# Altium PCB 蓝牙门禁PCB.PcbDoc
Units mm, origin at the board's own origin, x right, y up, seen from the top; angles counter-clockwise.
Board outline 99.95 x 68.33 mm, 2 copper layers (Top Layer, Bottom Layer); 17 components, 26 nets, 120 pads, 27 vias.
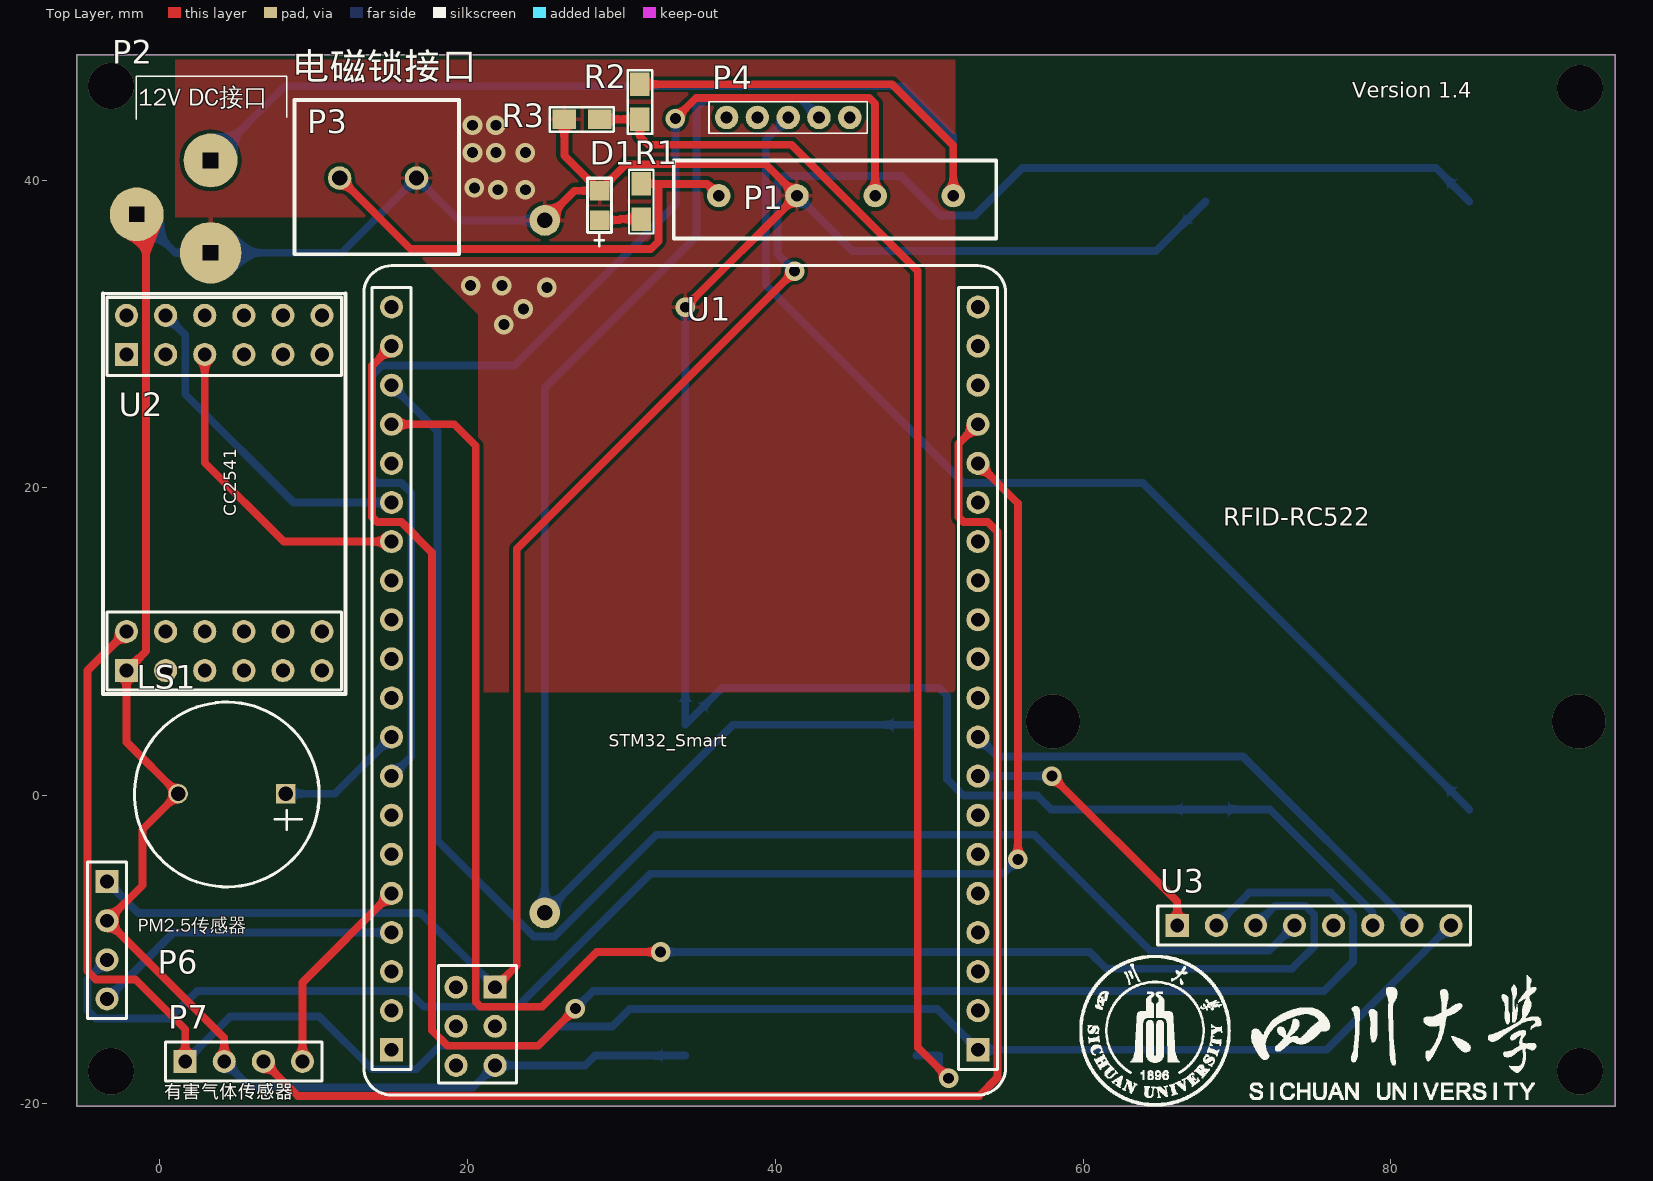
[diagram p0: Top Layer view]
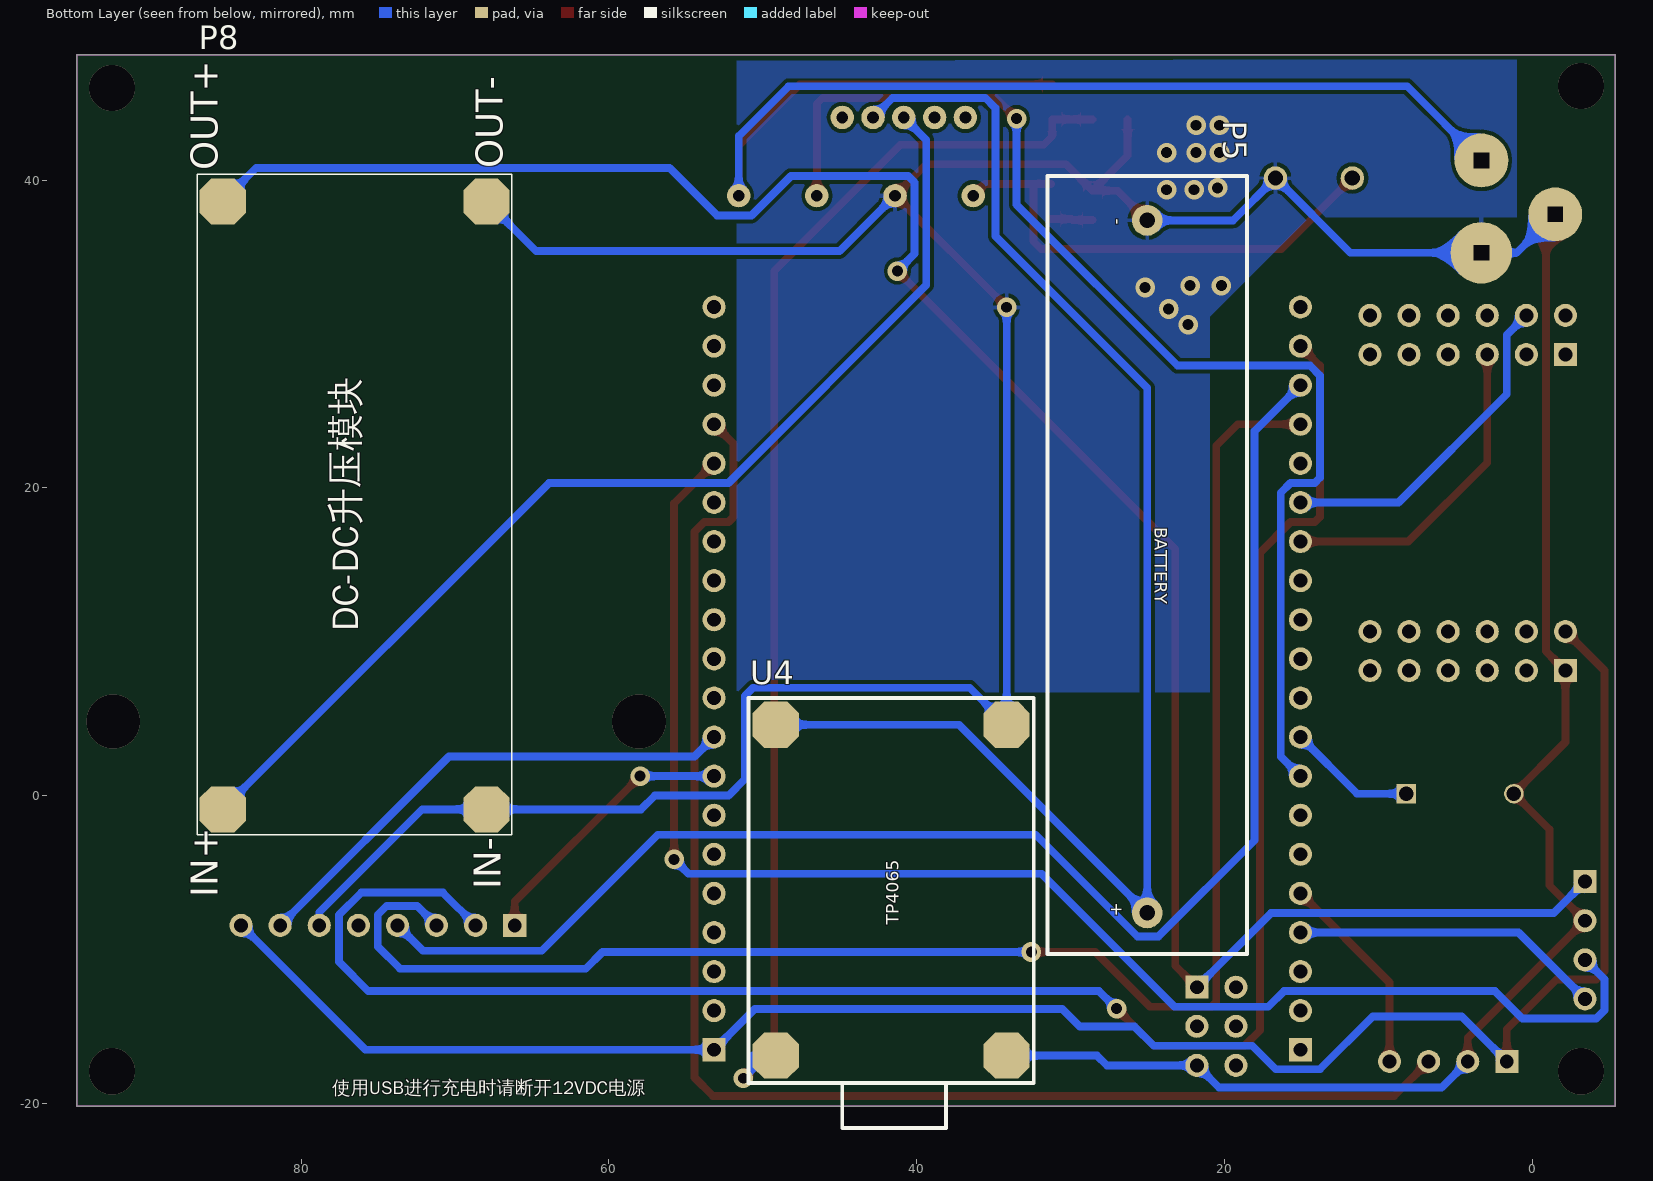
[diagram p1: Bottom Layer view, seen from below]

## Layer stack, top to bottom
Top Solder: solder mask 0.0102, Solder Resist, Dk 3.5
Top Layer: signal copper 0.0356
Dielectric 1: dielectric 0.32, FR-4, Dk 4.8
Bottom Layer: signal copper 0.0356
Bottom Solder: solder mask 0.0102, Solder Resist, Dk 3.5

## Board outline
-5.386,48.133 94.563,48.133 94.563,-20.193 -5.386,-20.193

## Design rules (kind name [scope] priority, off if disabled: settings)
Clearance [All] p1: gap=0.254
PolygonConnect [All] p1: connectstyle=Relief reliefconductorwidth=0.254 reliefentries=4 polygonreliefangle="90 Angle" airgapwidth=0.254
RoutingVias [All] p1: holewidth=0.711 width=1.27 viastyle="Through Hole" minholewidth=0.711 minwidth=1.27 maxholewidth=0.711 maxwidth=1.27
SolderMaskExpansion [All] p1: expansion=0.102
Width [All] p1: maxlimit=1.27 minlimit=0.254 preferedwidth=0.508 minimp=50.000000 maximp=50.000000 favimp=50.000000
30 further rules are at their usual default settings.

## Components (designator, comment, footprint, x,y, rotation, side; value= is the part's Value field where it differs from the comment)
D1 "LED0" 0805-led 28.575,38.354 r90 top
LS1 "Bell" BUZZER-12MM 4.445,0.127 r180 top
P1 "干簧继电器" 干簧继电器SIP-1A05 51.562,38.989 r180 top
P2 "12V电源" DC-005(5.5MM) 3.302,41.275 r270 top
P3 "接电磁锁" 接线端子-0.5 11.684,40.132 r0 top
P4 "电源开关" 拨动开关（2mm） 44.831,44.069 r180 top
P5 "电池座" 7号电池盒-4.5CM 25.019,-6.731 r90 bottom
P6 "MQ-2接口" HDR1X4 -3.429,-5.588 r270 top
P7 "雾霾传感器接口" HDR1X4 1.651,-17.272 r0 top
P8 "升压模块" DC-DC升压模块 85.09,-0.889 r90 bottom
R1 "500" 0805-SMALL 31.271,39.752 r270 top
R2 "100欧" 0805-SMALL 31.19,46.228 r270 top
R3 "100欧" 0805-SMALL 28.575,43.942 r180 top
U1 "STM32" STM32_Smart 15.061,-16.51 r270 top
U2 "CC2541" Smart_RF_2541 -2.159,8.128 r90 top
U3 "RC522" HDR1X8 66.114,-8.428 r0 top
U4 "TP4065" TP4065_模块 49.149,-16.891 r90 bottom

## Footprints (in the part's own frame and the unit in brackets; to place one, negate y for a bottom-side part, rotate by r counter-clockwise, add the part's x,y. Pads: shape width x height; smd on the part's side, far side on the other; paste and mask are expansions set on the pad)
7号电池盒-4.5CM [mm]
  round 2 hole 1: 1(-0.889,0) 2(44.111,0)
  silkscreen extent -3.56,-6.48 46.99,6.48
0805-led [mil]
  rect 50x50 smd: 1(-37.5,0) 2(37.5,0)
  silkscreen extent -105,-31 69,31
0805-SMALL [mil]
  rect 60x50 smd: 1(0,0) 2(90,0)
  silkscreen extent -36,-31 127,32
BUZZER-12MM [mm]
  rect 1.27x1.27 hole 0.95: 1(-3.75,0)
  round 1.27 hole 0.95: 2(3.25,0)
  silkscreen extent -5.91,-5.95 6.09,6.05
DC-005(5.5MM) [mm]
  round 3.5 hole 1 square: 1(0,0) 2(3.5,-4.8)
  round 4 hole 1 square: 3(6,0)
  silkscreen extent -5.46,-4.83 -2.67,4.95
DC-DC升压模块 [mil]
  oct 118.11x118.11 / inner oct 118.11x118.11 / far side oct 0x0 all layers, no hole: 1(0,0) 2(0,-675) 3(1555,0) 4(1555,-675)
  silkscreen extent -65,-740 1625,65
HDR1X4 [mm] "Connector; Header; 4 Position"
  rect 1.5x1.5 hole 0.9: 1(0,0)
  round 1.5 hole 0.9: 2(2.54,0) 3(5.08,0) 4(7.62,0)
  silkscreen extent -1.27,-1.27 8.89,1.27
HDR1X8 [mm] "Connector; Header; 8 Position"
  rect 1.5x1.5 hole 0.9: 1(0,0)
  round 1.5 hole 0.9: 2(2.54,0) 3(5.08,0) 4(7.62,0) 5(10.16,0) 6(12.7,0) 7(15.24,0) 8(17.78,0)
  silkscreen extent -1.27,-1.27 19.05,1.27
Smart_RF_2541 [mm]
  rect 1.5x1.5 hole 0.9: 1(0,0) 13(20.54,0)
  round 1.5 hole 0.9: 2(0,-2.54) 3(0,-5.08) 4(0,-7.62) 5(0,-10.16) 6(0,-12.7) 7(2.54,-12.7) 8(2.54,-10.16) 9(2.54,-7.62) 10(2.54,-5.08) 11(2.54,-2.54) 12(2.54,0) 14(20.54,-2.54) 15(20.54,-5.08) 16(20.54,-7.62) 17(20.54,-10.16) 18(20.54,-12.7) 19(23.08,-12.7) 20(23.08,-10.16) 21(23.08,-7.62) 22(23.08,-5.08) 23(23.08,-2.54) 24(23.08,0)
  silkscreen extent -1.52,-14.22 24.51,1.52
STM32_Smart [mm]
  rect 1.5x1.5 hole 0.9: 1(0,38.1) 40(0,0) 46(-4.064,6.731)
  round 1.5 hole 0.9: 2(-2.54,38.1) 3(-5.08,38.1) 4(-7.62,38.1) 5(-10.16,38.1) 6(-12.7,38.1) 7(-15.24,38.1) 8(-17.78,38.1) 9(-20.32,38.1) 10(-22.86,38.1) 11(-25.4,38.1) 12(-27.94,38.1) 13(-30.48,38.1) 14(-33.02,38.1) 15(-35.56,38.1) 16(-38.1,38.1) 17(-40.64,38.1) 18(-43.18,38.1) 19(-45.72,38.1) 20(-48.26,38.1) 21(-48.26,0) 22(-45.72,0) 23(-43.18,0) 24(-40.64,0) 25(-38.1,0) 26(-35.56,0) 27(-33.02,0) 28(-30.48,0) 29(-27.94,0) 30(-25.4,0) 31(-22.86,0) 32(-20.32,0) 33(-17.78,0) 34(-15.24,0) 35(-12.7,0) 36(-10.16,0) 37(-7.62,0) 38(-5.08,0) 39(-2.54,0) 41(-4.064,4.191) 42(-1.524,4.191) 43(1.016,4.191) 44(1.016,6.731) 45(-1.524,6.731)
  silkscreen extent -50.95,-1.8 2.94,39.9
TP4065_模块 [mm]
  oct 3x3 / inner oct 3x3 / far side oct 0x0 all layers, no hole: 1(0,0) 2(0,-15) 3(21.5,-15) 4(21.5,0)
  silkscreen extent -4.7,-16.76 23.24,1.78
干簧继电器SIP-1A05 [mil]
  round 60 hole 30: 1(0,0) 2(200,0) 3(400,0) 4(600,0)
  silkscreen extent -110,-90 715,110
拨动开关（2mm） [mil]
  round 60 hole 30: 0(0,0) 0(314.96,0) 1(78.74,0) 2(157.48,0) 3(236.22,0)
  silkscreen extent -45,-40 360,40
接线端子-0.5 [mil]
  round 60 hole 39.37: 1(0,0) 2(196.85,0)
  silkscreen extent -115,-195 305,200

## Part data
D1: "Typical INFRARED GaAs LED"
LS1: "Electrical Bell"
P1 P6 P7 P8: library part "Header 4", "Header, 4-Pin"
P2 P4: library part "Header 3", "Header, 3-Pin"
P3: library part "Header 2H", "Header, 2-Pin, Right Angle"
P5: library part "Header 2", "Header, 2-Pin"
R1 R2 R3: library part RES2
U1: library part STM32_Smart
U2: library part Smart_RF_2541
U3: library part RFID_RC522
U4: library part "TP4056_ 模块"

## Via types
v1: diameter 1.27, hole 0.711, Top Layer to Bottom Layer, 21 vias
v2: diameter 3, hole 3, Top Layer to Bottom Layer, 4 vias
v3: diameter 3.5, hole 3.5, Top Layer to Bottom Layer, 2 vias

## Nets (pads, with @x,y where several pads share a name; then routed paths per layer and width w, separated by ;. In a path a pad name is that pad's centre, name@x,y a point inside that pad or via, vN(x,y) a via of type N, cw(c..) or ccw(c..) an arc to the next point about the centre after c; other vN are vias at no path point)
ADC1: P6.3 U1.16 | length 96.4
  Top Layer w0.508: U1.16 55.757,18.994 v1(55.757,-4.139)
  Bottom Layer w0.508: P6.3 -4.695,-11.934 -4.695,-13.944 -4.162,-14.477 0.639,-14.477 2.417,-12.699 16.133,-12.699 17.149,-13.715 23.245,-13.715 31.881,-5.079 54.817,-5.079 v1(55.757,-4.139)
ADC2: P7.3 U1.17 | length 94.1
  Top Layer w0.508: P7.3 8.965,-19.506 53.242,-19.506 54.436,-18.312 54.436,17.146 53.801,17.781 52.226,17.781 51.903,18.104 51.903,22.872 U1.17
GND: D1.2 LS1.2 P1.3 P2.2 P2.3 P3.2 P5.2 P6.2 P7.2 P8.2 P8.4 R3.2 U1.44 U2.1 U3.6 U4.2 U4.3 | length 271.7
  Top Layer w0.508: P2.2 -0.885,37.775 -0.885,9.402 U2.1 -2.159,3.481 LS1.2 -1.114,-2.182 -1.114,-5.813 P6.2 4.191,-15.748 P7.2 ; P5.2 26.946,39.306 D1.2 ; R3.2 26.289,41.592 D1.2 ; v1(34.149,31.736) P1.3 39.369,41.022 30.291,41.022 D1.2
  Bottom Layer w0.508: P2.2 1.002,35.275 P2.3 11.827,35.275 P3.2 19.436,37.38 P5.2 ; P7.2 5.892,-18.973 20.345,-18.973 U1.44 27.639,-17.526 28.274,-16.891 U4.2 ; v1(34.149,31.736) U4.3 36.551,7.011 50.626,7.011 51.159,6.478 51.159,1.068 52.226,0.001 57.016,0.001 57.906,-0.889 P8.2 72.119,-0.889 78.814,-7.584 U3.6 ; P1.3 45.008,35.383 64.72,35.383 P8.4
  other v1: 22.352,30.607 23.622,31.623 25.146,33.02 20.193,33.147 22.225,33.147 21.971,39.37 23.749,39.37 20.447,39.497 20.32,41.783 21.844,41.783 23.749,41.783 20.32,43.561 21.844,43.561
IRQ: U3.5
MISO: U1.23 U3.4 | length 95.6
  Bottom Layer w0.508: U1.23 18.038,23.693 18.038,-2.895 24.286,-9.143 25.658,-9.143 32.262,-2.539 56.823,-2.539 64.367,-10.083 72.079,-10.083 U3.4
MOSI: U1.24 U3.3 | length 106
  Top Layer w0.508: U1.24 19.131,24.13 20.527,22.734 20.527,-13.399 20.843,-13.715 24.839,-13.715 28.395,-10.159 v1(32.541,-10.159)
  Bottom Layer w0.508: v1(32.541,-10.159) 60.405,-10.159 61.497,-11.251 73.562,-11.251 75.01,-9.803 75.01,-7.746 74.426,-7.162 72.46,-7.162 U3.3
NetD1_1: D1.1 R1.2 | length 2.7
  Top Layer w0.508: D1.1 29.874,37.401 29.938,37.466 R1.2
NetP1_4: P1.4 P3.1 R1.1 | length 32.1
  Top Layer w0.508: P3.1 16.306,35.51 31.906,35.51 32.414,36.018 32.414,39.498 32.16,39.752 ; R1.1 32.16,39.752 ; P1.4 35.559,39.752 32.16,39.752
NetR2_2: R2.2 R3.1 U4.1 | length 81.9
  Top Layer w0.508: R3.1 R2.2 31.19,42.846 31.744,42.292 41.05,42.292 49.254,34.088 49.254,-16.357 v1(51.261,-18.363)
  Bottom Layer w0.508: U4.1 50.651,-16.891 50.651,-17.754 v1(51.261,-18.363)
P21: U2.11
P22: U2.2
PB4: LS1.1 U1.32 | length 8.4
  Bottom Layer w0.508: LS1.1 11.378,0.127 U1.32
PB5: P1.2 U1.33 | length 78.1
  Top Layer w0.508: v1(33.506,43.994) 34.852,45.34 46.105,45.34 46.482,44.963 P1.2
  Bottom Layer w0.508: U1.33 16.336,2.545 16.336,19.686 15.701,20.321 14.126,20.321 13.796,20.651 13.796,27.306 14.431,27.941 23.041,27.941 33.506,38.406 v1(33.506,43.994)
PB8: P7.4 U1.36 | length 13.3
  Top Layer w0.508: P7.4 9.271,-12.14 U1.36
PB9: P6.4 U1.37 | length 20.3
  Bottom Layer w0.508: P6.4 0.889,-8.89 U1.37
RESET: U2.13
RST: U1.9 U3.7 | length 33.3
  Bottom Layer w0.508: U1.9 54.43,2.541 70.385,2.541 U3.7
SCK: U1.22 U3.2 | length 123.4
  Top Layer w0.508: U1.22 13.796,27.945 13.796,18.111 14.126,17.781 15.701,17.781 17.682,15.8 17.682,-15.239 18.698,-16.255 24.591,-16.255 v1(27.004,-13.842)
  Bottom Layer w0.508: v1(27.004,-13.842) 28.147,-12.699 75.627,-12.699 77.532,-10.794 77.532,-7.746 76.084,-6.298 70.784,-6.298 U3.2
SDA: U1.8 U3.1 | length 17.9
  Top Layer w0.508: v1(57.967,1.27) 66.114,-6.877 U3.1
  Bottom Layer w0.508: U1.8 v1(57.967,1.27)
STM32RX-2541TX: U1.27 U2.15 | length 21.3
  Top Layer w0.508: U2.15 2.921,21.642 8.053,16.51 U1.27
STM32TX-2541RX: U1.26 U2.23 | length 22
  Bottom Layer w0.508: U2.23 1.655,29.934 1.655,26.087 8.691,19.05 U1.26
VCC: P1.1 P2.1 R2.1 | length 80.7
  Top Layer w0.508: R2.1 47.579,46.228 51.562,42.245 P1.1
  Bottom Layer w0.508: P2.1 8.128,46.101 48.315,46.101 51.562,42.854 P1.1
VCC3.3: P7.1 U1.1 U2.12 U3.8 | length 124.1
  Top Layer w0.508: U2.12 -4.695,8.132 -4.695,-11.404 -4.162,-11.937 -1.597,-11.937 1.651,-15.185 P7.1
  Bottom Layer w0.508: P7.1 4.573,-14.35 10.367,-14.35 13.796,-17.779 16.666,-17.779 18.19,-16.255 24.591,-16.255 25.848,-14.997 29.403,-14.997 30.533,-13.867 50.518,-13.867 U1.1 75.812,-16.51 U3.8
VCC5: P6.1 P8.3 U1.46 | length 137.3
  Top Layer w0.508: U1.46 23.194,-11.044 23.194,16.028 v1(41.253,34.088)
  Bottom Layer w0.508: P6.1 -1.398,-7.619 16.965,-7.619 U1.46 ; v1(41.253,34.088) 40.132,35.209 40.132,39.849 40.542,40.259 48.162,40.259 50.726,37.695 52.963,37.695 56.061,40.793 82.905,40.793 P8.3
VCCBAT: P4.2 P8.1 | length 71.3
  Bottom Layer w0.508: P4.2 39.37,42.608 39.37,33.177 52.226,20.321 63.88,20.321 P8.1
VCCD: P4.1 P5.1 U4.4 | length 94.3
  Bottom Layer w0.508: P4.1 41.561,45.339 35.538,45.339 34.874,44.675 34.874,36.345 25.019,26.49 P5.1 37.248,4.609 U4.4
pads on no net: P4.0 P4.3 U1.2 U1.3 U1.4 U1.5 U1.6 U1.7 U1.10 U1.11 U1.12 U1.13 U1.14 U1.15 U1.18 U1.19 U1.20 U1.21 U1.25 U1.28 U1.29 U1.30 U1.31 U1.34 U1.35 U1.38 U1.39 U1.40 U1.41 U1.42 U1.43 U1.45 U2.3 U2.4 U2.5 U2.6 U2.7 U2.8 U2.9 U2.10 U2.14 U2.16 U2.17 U2.18 U2.19 U2.20 U2.21 U2.22 U2.24
copper on no net:
  other v2: -3.175,-17.907 92.277,-17.907 92.277,45.974 -3.175,46.101
  other v3: 58.039,4.826 92.202,4.826

## Polygon pours and split planes (outlines as drawn)
GND on Top Layer "Top Overlay-No Net" (solid, pour order 2): 0.889,48.006 1.016,47.879 1.016,37.592 14.351,37.592 20.701,31.242 20.701,6.731 51.562,6.731 51.689,6.858 51.689,47.879
GND on Bottom Layer "Top Overlay-No Net" (solid, pour order 3): 1.016,47.879 1.016,37.592 13.335,37.592 14.478,37.592 20.828,31.242 20.955,31.115 20.955,6.731 51.689,6.731 51.689,47.752

## Keep-outs
Keep-Out Layer:
  lines w0.1: -5.386,-20.193 89.864,-20.193 94.563,-20.193 94.563,48.133 -5.386,48.133 -5.386,-20.193

## Silkscreen, mask and mechanical layers (free items; w line width, h text height)
Top Overlay:
  drawing of 5726 lines, arcs and shapes, not listed
  text "电磁锁接口" at 8.636,45.974 h3
  text "Version 1.4" at 77.47,45.339 h1
  text "12V DC接口" at -1.397,44.45 h2
  text "RFID-RC522" at 69.088,17.145 h2
  text "PM2.5传感器" at -1.397,-9.144 h1.5
  text "有害气体传感器" at 0.254,-19.939 h1.5
Bottom Overlay:
  text "使用USB进行充电时请断开12VDC电源" at 77.978,-19.685 h1.5

## Text inside footprints (layer, text, board x,y; h text height)
P5: Bottom Overlay "BATTERY" at 24.512,17.445 h0.8 r90; Bottom Overlay "+" at 26.67,-7.874 h0.8 r270; Bottom Overlay "-" at 26.67,37.084 h0.8 r270
P8: Bottom Overlay "DC-DC升压模块" at 75.692,10.668 h3 r270; Bottom Overlay "OUT+" at 84.836,40.64 h3 r270; Bottom Overlay "OUT-" at 66.294,40.767 h3 r270; Bottom Overlay "IN-" at 66.421,-6.096 h3 r270; Bottom Overlay "IN+" at 84.836,-6.604 h3 r270
U1: Top Overlay "STM32_Smart" at 29.158,3.175 h0.8